# Altium PCB 630-DC2044B_REV01_DESIGN_LAYOUT.PcbDoc (part 2 of 2)
Units mil, origin at the board's own origin, x right, y up, seen from the top; angles counter-clockwise.
Board outline 3850 x 4475 mil, 4 copper layers (L1-TOP, L2- PGND/SGND-PLANE, L3-PGND/SGND-PLANE, L4-BOTTOM), stack 63.2 mil thick; 129 components, 57 nets, 276 pads, 188 vias.
Unrouted connection lines stored in the file: 3.
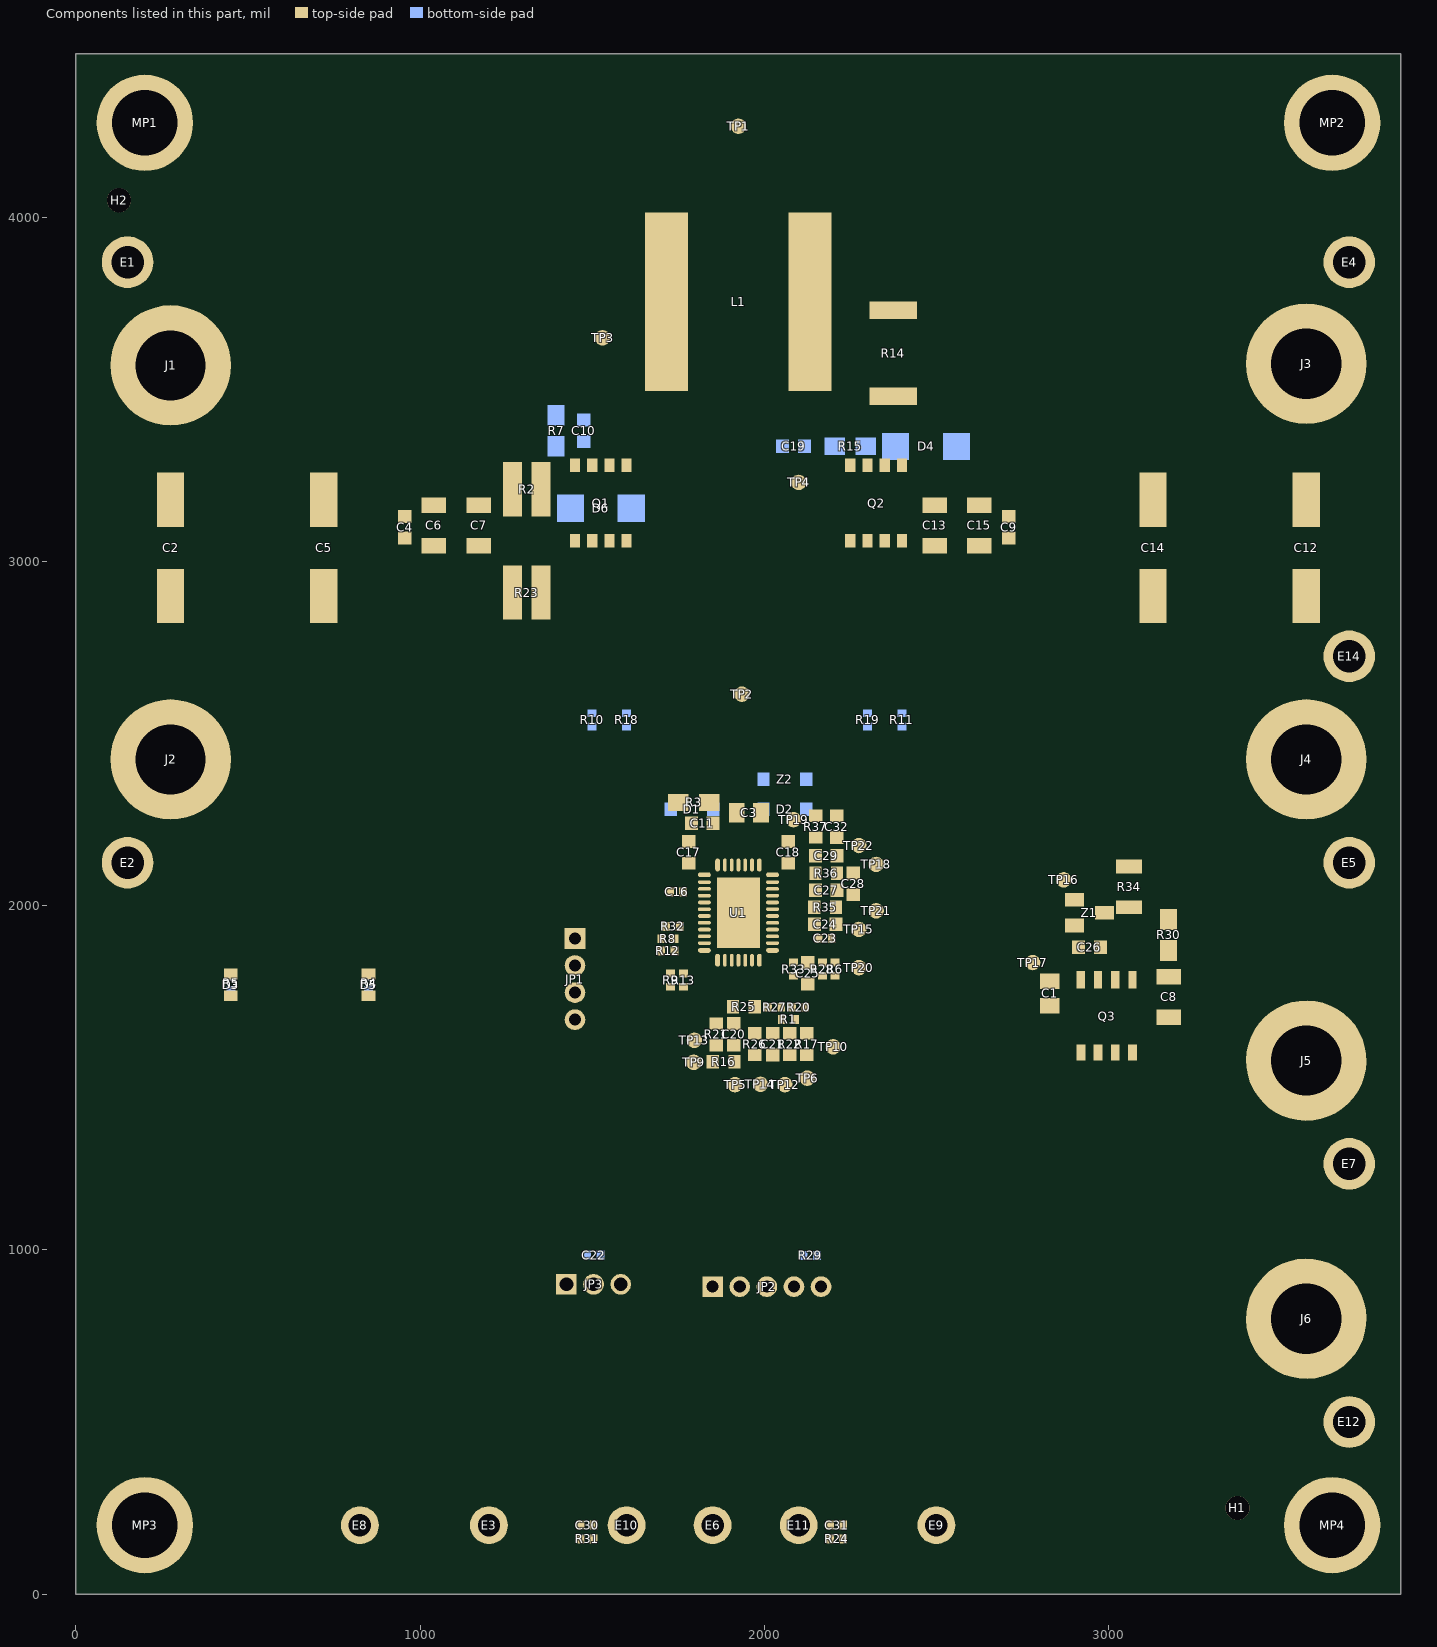
[diagram p4: the components of this part, seen from the top]

## Silkscreen, mask and mechanical layers (free items; w line width, h text height) (continued)
Assembly Drawing Top:
  drawing of 1142 lines, arcs and shapes, not listed
  text "REVISION HISTORY" at 10242.8,5160 h120
  text "APP. ENG." at 11007.8,5010 h100
  text "DATE" at 11577.8,5010 h100
  text "ECO" at 9462.8,5005 h100
  text "REV" at 9692.8,5005 h100
  text "DESCRIPTION" at 10127.8,5005 h100
  text "-" at 9542.8,4870 h100
  text "01" at 9742.8,4870 h100
  text "PRODUCTION" at 10162.8,4870 h100
  text "WT" at 11117.8,4870 h100
  text "09-07-21" at 11515,4870 h100
  text "NOTES: UNLESS OTHERWISE SPECIFIED" at 6417.8,4345 h200
  text "DETAIL \"A\"" at 4115.62,4229.83 h75
  text "1. WORKMANSHIP SHALL BE IN ACCORDANCE WITH IPC-A-610." at 5959.8,4034 h150
  text "2. ASSEMBLY REFLOW PROFILE SHALL BE IN ACCORDANCE WITH J-STD-020 WITH" at 5959.8,3834 h150
  text "MAXIMUM SOLDER TEMPERATURE OF 250 DEGREES CELSIUS." at 6159.8,3659 h150
  text "3. PARTS TO OMIT WILL BE SPECIFIED ON THE BILL OF MATERIALS" at 5959.8,3434 h150
  text "LOCATIONS OF OMITTED PARTS SHALL BE FREE OF SOLDER." at 6159.8,3234 h150
  text "MASK THE SOLDER STENCIL WHERE SMT PARTS ARE OMITTED." at 6159.8,3034 h150
  text "4. INSTALL SHUNTS AS SHOWN ON ASSY DRAWING." at 5959.8,2834 h150
  text "DETAIL \"B\"" at 4087.82,2685.69 h75
  text "5. DEPANELIZE BOARDS AFTER ASSEMBLY AND ROUTE-OUT THE BREAKOUT" at 5959.8,2634 h150
  text "TABS ON FOUR SIDES OF THE BOARD EDGE." at 6107.8,2475 h150
  text "DETAIL \"C\"" at 4047.82,2385.69 h75
  text "6. APPLY ASSEMBLY STAMP OR QA STAMP TO BOTTOM OF BOARD (UNSHOWY AREA)." at 5949.8,2249 h150
  text "7. INSTALL TURRETS, STAND-OFFS AS SHOWN BELOW:" at 5947.8,2040 h150
  text "8. APPLY DEMO S/N AT AREA ON BOTTOM SIDE AS SHOWN ON SHEET 2." at 5942.8,1845 h150
  text "(6 PLCS) : MILL-MAX 2308" at 8542.8,1520 h100
  text "DETAIL \"B\"" at 10257.8,1431.25 h60
  text "DETAIL \"A\"" at 7182.8,1430 h60
  text "(6 PLCS) : MILL-MAX 2501" at 8548.3,1392.75 h50
  text "PCB : TOP" at 6430.3,1308.09 h50
  text "PCB : TOP" at 9482.8,1118.75 h50
  text "PCB" at 8107.8,1005 h50
  text "PCB : BOTTOM" at 6430.3,808.09 h50
  text "4X" at 7977.55,693.16 h50
  text "STAND-OFF,NYLON" at 7702.55,568.16 h50
  text "PCB : BOTTOM" at 9332.8,506.25 h50
  text "SNAP ON" at 7827.55,443.16 h50
  text "DETAIL \"C\"" at 7184.8,86 h60
  text "(6 PLCS) : KEYSTONE 575-4" at 7959.8,36 h50
  text "PCB TOP" at 6384.8,-139 h50
  text "PCB BOTTOM" at 6259.8,-764 h50
  text "P" at 10762.11,-936.34 h35
  text "O" at 10822.11,-936.34 h35
  text "W" at 10892.11,-936.34 h35
  text "E" at 10972.11,-936.34 h35
  text "R" at 11032.11,-936.34 h35
  text "B" at 11117.11,-936.34 h35
  text "Y" at 11177.11,-936.34 h35
  text "APPROVALS" at 8487.8,-965 h150
  text "ANALOG" at 9820.11,-977.34 h78.74
  text "DEVICES" at 9812.11,-1099.34 h78.74
  text "TM" at 11222.11,-1101.34 h25
  text "PCB DES" at 8322.8,-1190 h100
  text "NC" at 8887.8,-1205 h100
  text "FOR ADI CUSTOMER USE ONLY" at 10922.11,-1211.34 h35
  text "WT" at 8887.8,-1380 h100
  text "TITLE:" at 9442.8,-1385 h100
  text "TOP ASSEMBLY DRAWING" at 9742.8,-1385 h100
  text "APP ENG" at 8322.8,-1390 h100
  text "HIGH VOLTAGE BUCK/BOOST" at 9800,-1525 h120
  text "MULTI-CHEMISTRY BATTERY CHARGER" at 9800,-1650 h120
  text "SIZE" at 9477.8,-1830 h100
  text "IC NO." at 9762.8,-1830 h100
  text "REV." at 11522.8,-1830 h100
  text "LTC4020" at 10050,-1850 h125
  text "N/A" at 9482.8,-1975 h120
  text "DC2044B" at 10050,-1975 h125
  text "01" at 11642.8,-1980 h130
  text "SCALE = NONE" at 8547.8,-2140 h100
  text "SHT 1 OF 1" at 11237.8,-2140 h100
Assembly Drawing Bottom:
  drawing of 903 lines, arcs and shapes, not listed
  text "8    DEMO S/N LABEL" at -625,1210 h100
  text "APPLY IN THIS AREA" at -700,1100 h100
  text "Y" at -1834.26,-854.96 h35
  text "B" at -1774.26,-854.96 h35
  text "R" at -1689.26,-854.96 h35
  text "E" at -1629.26,-854.96 h35
  text "W" at -1549.26,-854.96 h35
  text "O" at -1479.26,-854.96 h35
  text "P" at -1419.26,-854.96 h35
  text "APPROVALS" at 777.8,-895 h150
  text "ANALOG" at -477.26,-895.96 h78.74
  text "DEVICES" at -469.26,-1017.96 h78.74
  text "TM" at -1879.26,-1019.96 h25
  text "FOR ADI CUSTOMER USE ONLY" at -1634.2,-1105 h70
  text "PCB DES." at 882.8,-1145 h100
  text "NC" at 317.8,-1155 h100
  text "BOTTOM ASSEMBLY DRAWING" at -492.2,-1330 h100
  text "TITLE:" at -217.2,-1330 h100
  text "WT" at 312.8,-1330 h100
  text "APP ENG." at 897.8,-1330 h100
  text "HIGH VOLTAGE BUCK/BOOST" at -275,-1475 h120
  text "MULTI-CHEMISTRY BATTERY CHARGER" at -275,-1600 h120
  text "REV" at -2312.2,-1775 h100
  text "SIZE" at -232.2,-1795 h100
  text "IC NO." at -522.2,-1805 h100
  text "LTC4020" at -828.2,-1818 h125
  text "01" at -2406.2,-1915 h130
  text "N/A" at -217.2,-1940 h130
  text "DC2044B" at -825,-1950 h125
  text "SHT 2 of 2" at -2077.2,-2085 h100
  text "SCALE = NONE" at 752.8,-2095 h100
Layer_14:
  circle w10: c4307.5,3475 r112.5
  circle w10: c4123.75,1541.25 r112.5
  circle w10: c4323.75,1003.75 r112.5
  circle w10: c4120,2987.5 r112.5
  circle w10: c-263.75,3033.75 r112.5
  circle w10: c-463.75,3571.25 r112.5
  lines w10: -796.25,3008.75 -590,3008.75 ; -796.25,3083.75 -590,3083.75 ; -740,2971.25 -646.25,2971.25 ; -740,3046.25 -646.25,3046.25 ; -688.75,2971.25 -688.75,2496.25 36.25,2496.25 291.25,2641.25 ; -688.75,3086.25 -688.75,3571.25 -578.75,3571.25 ; -348.75,3571.25 36.25,3571.25 286.25,3421.25 -263.75,3421.25 -263.75,3152.5 ; -263.75,2921.25 -263.75,2646.25 286.25,2646.25 ; 3568.75,1933.75 3823.75,2078.75 4548.75,2078.75 4548.75,1635 ; 3570,2625 4120,2625 4120,2875 ; 3570,3390 3820,3475 4195,3475 ; 3573.75,1928.75 4123.75,1928.75 4123.75,1653.75 ; 3575,2625 3815,2480 ; 3575,3380 4120,3380 4120,3100 ; 3820,2480 4545,2480 4545,2900 ; 4123.75,1422.5 4123.75,1153.75 3573.75,1153.75 3823.75,1003.75 4208.75,1003.75 ; 4420,3475 4545,3475 4545,3075 ; 4438.75,1003.75 4548.75,1003.75 4548.75,1455 ; 4340,1460 4340,1635 4805,1635 4805,1460 4340,1460 ; 4395,2900 4395,3075 4695,3075 4695,2900 4395,2900
  text "+" at -663.75,3671.25 h62.5 r180
  text "-" at -263.75,3590 h62.5
  text "+" at 4120.64,3572.41 h62.5 r180
  text "A" at -485,3535 h62.5
  text "-" at 4495.64,3497.41 h62.5
  text "A" at 4320,3430 h55
  text "+" at 3995.64,3172.41 h62.5 r180
  text "+" at -213.75,3146.25 h62.5
  text "+" at -727.5,3112.5 h62.5
  text "+" at 4645.64,3097.41 h62.5
  text "V" at -280,2990 h62.5
  text "LOAD" at 4443.14,2949.91 h55
  text "V" at 4145.64,2947.41 h62.5
  text "-" at -727.5,2882.5 h62.5
  text "-" at -213.75,2846.25 h62.5
  text "-" at 4645.64,2822.41 h62.5
  text "-" at 4045.64,2797.41 h62.5
  text "-" at 4073.75,1728.75 h62.5 r180
  text "-" at 4590,1720 h62.5 r180
  text "BETTERY" at 4360,1500 h62.5
  text "V" at 4095,1495 h62.5
  text "+" at 4073.75,1428.75 h62.5 r180
  text "+" at 4590,1415 h62.5 r180
  text "-" at 4123.75,985 h62.5 r180
  text "A" at 4305,965 h62.5
  text "+" at 4523.75,903.75 h62.5
Layer_15:
  lines w10: -62.33,333.88 780.74,333.88
  text "COMPONENT SIDE" at -57.34,363.88 h60
Layer_18:
  text "SILKSCREEN TOP" at 2335,-290 h50
Drill Drawing:
  drawing of 1514 lines, arcs and shapes, not listed
  text "REVISION HISTORY" at 10062.8,4865 h120
  text "APP. ENG." at 10812.8,4740 h100
  text "DATE" at 11387.8,4740 h100
  text "DESCRIPTION" at 9937.8,4735 h100
  text "ECO" at 9277.8,4730 h100
  text "REV" at 9507.8,4730 h100
  text "PRODUCTION" at 9942.8,4595 h100
  text "WT" at 10917.8,4595 h100
  text "09-07-21" at 11340,4595 h100
  text "-" at 9362.8,4590 h100
  text "01" at 9557.8,4585 h100
  text "LAYER STRUCTURE" at 6092.8,4495 h170
  text "4.475\"" at -425,4450 h100
  text "THICKNESS (IN)" at 5612.8,4220 h100
  text ".0005\"" at 6012.8,4095 h100
  text "SOLDER MASK" at 6487.8,4095 h100
  text ".0028\"" at 6011.8,3988 h100
  text "TOP LAYER" at 7465.8,3988 h100
  text ".012\"" at 6011.8,3838 h100
  text "PREPREG" at 7465.8,3838 h100
  text ".0028\"" at 6011.8,3688 h100
  text "INNNER LAYER" at 7465.8,3688 h100
  text ".062\" +/- 10%" at 5312.8,3620 h100
  text ".028\"" at 6037.8,3545 h100
  text "CORE MATERIAL" at 7465.8,3538 h100
  text "4 LAYERS" at 5362.8,3520 h100
  text ".0028\"" at 6011.8,3388 h100
  text "INNER LAYER" at 7465.8,3388 h100
  text ".012\"" at 6011.8,3238 h100
  text "PREPREG" at 7465.8,3238 h100
  text ".0028\"" at 6011.8,3088 h100
  text "BOTTOM LAYER" at 7465.8,3088 h100
  text ".0005\"" at 6012.8,2970 h100
  text "SOLDER MASK" at 6487.8,2970 h100
  text "NOTES: UNLESS OTHERWISE SPECIFIED" at 5767.8,2495 h204
  text "1. FABRICATION: FABRICATION AND ACCEPTANCE TO MEET THE REQUIREMENTS OF IPC-A-600" at 5642.8,2095 h125
  text "AND IPC/ANSI-MLL950-C CLASS 2, AOL .25 GENERAL INSPECTION LEVEL II." at 6592.8,1970 h125
  text "2. MATERIAL: - EPOXY FIBERGLASS, NEMA GRADE FR-4" at 5657.66,1802.01 h120
  text "- FINISHED THICKNESS TO BE 0.062\" +/- .005\"" at 6401.66,1649.01 h120
  text "- TOTAL OF 4 LAYERS WITH 2 OZ. CU ON THE ALL LAYERS" at 6401.66,1499.01 h120
  text "- FLAMMABILITY RATING: 94 V-O MINIMUM." at 6401.66,1349.01 h120
  text "4. SIZE: CUT TO DIMENSIONS AND TOLERANCES SHOWN 0.00\" ARE PRIMARY DATUMS." at 5662.8,1170 h120
  text "5. FRONT TO BACK LAYER REGISTRATION." at 5662.8,970 h120
  text "-SHALL BE WITHIN 0.005\" (0.13mm) TO COMPLY WITH IPC-A-600, CLASS 2." at 6387.8,820 h120
  text "5. DRILLING:  - DRILL HOLES PER SCHEDULE. PLATE THROUGH" at 5637.8,620 h120
  text "HOLES WITH COPPER, 0.001\" THICK MIN." at 6437.8,495 h120
  text "- ALL HOLE SIZES ARE SPECIFIED AFTER PLATING." at 6362.8,370 h120
  text "- HOLE LOCATION TOLERANCES ARE +/-0.003\" IN RELATION TO CENTER." at 6362.8,245 h120
  text "6. FINISH: - SMOBC USING LPI BOTH SIDES, PER IPC-SM-840, CLASS T,  COLOR GREEN. TENT BOTH SIDES." at 5637.8,95 h120
  text "0.00\"" at -340,-25 h100
  text "- APPLY ELECTROLESS NICKEL GOLD IMMERSION (ENIG) OVER EXPOSED COPPER PER IPC-4552." at 6337.8,-55 h120
  text "- FOR SILKSCREEN: BOTH SIDES USE WHITE NON-CONDUCTIVE INK." at 6312.8,-230 h120
  text "0.00\"" at 20,-330 h100 r90
  text "3.850\"" at 3875,-375 h100 r90
  text "7. DO NOT ALTER ARTWORK e.g. TO ADD LOGO OR DATE CODE." at 5662.8,-405 h120
  text "-PAD SIZE CAN BE MODIFIED TO MEET END FINISH." at 6362.8,-555 h120
  text "8. PCBS ARE TO BE RoHS COMPLIANT." at 5662.8,-755 h120
  text "9. SCORING FOR PANELIZED PCB:" at 5687.8,-980 h120
  text ".020" at 7342.94,-1245.25 h120
  text "x" at 6277.94,-1425.25 h96
  text "x" at 6322.94,-1425.25 h96
  text "x" at 6367.94,-1425.25 h96
  text "x" at 6412.94,-1425.25 h96
  text "x" at 6457.94,-1425.25 h96
  text "x" at 6502.94,-1425.25 h96
  text "x" at 6547.94,-1425.25 h96
  text "x" at 6592.94,-1425.25 h96
  text "x" at 6637.94,-1425.25 h96
  text "x" at 6682.94,-1425.25 h96
  text "x" at 6727.94,-1425.25 h96
  text "x" at 6772.94,-1425.25 h96
  text "x" at 6817.94,-1425.25 h96
  text "x" at 6862.94,-1425.25 h96
  text "x" at 6907.94,-1425.25 h60
  text "x" at 6277.94,-1545.25 h96
  text "x" at 6322.94,-1545.25 h96
  text "x" at 6367.94,-1545.25 h96
  text "x" at 6412.94,-1545.25 h96
  text "x" at 6457.94,-1545.25 h96
  text "x" at 6502.94,-1545.25 h96
  text "x" at 6547.94,-1545.25 h96
  text "x" at 6592.94,-1545.25 h96
  text "x" at 6637.94,-1545.25 h96
  text "x" at 6682.94,-1545.25 h96
  text "x" at 6727.94,-1545.25 h96
  text "x" at 6772.94,-1545.25 h96
  text "x" at 6817.94,-1545.25 h96
  text "x" at 6862.94,-1545.25 h96
  text "x" at 6907.94,-1545.25 h60
  text ".017" at 6217.94,-1684 h120
  text "ADDITIONAL REQUREMENT FOR PROTOTYPE FAB ONLY:" at 867.8,-1905 h120
  text "1. OUTGOING INSPECTION REPORT (BASED ON ACTUAL MEASUREMENTS AND CROSS SECTION)." at 817.8,-2080 h120
  text "UNLESS OTHERWISE SPECIFIED" at 7112.8,-2100 h70
  text "P" at 10552.39,-2128.87 h35
  text "O" at 10612.39,-2128.87 h35
  text "W" at 10682.39,-2128.87 h35
  text "E" at 10762.39,-2128.87 h35
  text "R" at 10822.39,-2128.87 h35
  text "B" at 10907.39,-2128.87 h35
  text "Y" at 10967.39,-2128.87 h35
  text "ANALOG" at 9610.39,-2169.87 h78.74
  text "APPROVALS" at 8342.8,-2185 h150
  text "DIMENSIONS ARE IN INCHES" at 7112.8,-2225 h80
  text "DEVICES" at 9602.39,-2291.87 h78.74
  text "TM" at 11012.39,-2293.87 h25
  text "ADDITIONAL REQUREMENTS FOR PRODUCTION FAB ONLY:" at 842.8,-2330 h120
  text "TOLERANCES:" at 7132.8,-2340 h80
  text "PCB DES" at 8177.8,-2390 h100
  text "NC" at 8812.8,-2390 h100
  text "FOR ADI CUSTOMER USE ONLY" at 10714.8,-2407 h70
  text "+" at 7582.8,-2410 h60
  text "0.XX\" =  0.01\"" at 7337.8,-2435 h80
  text "-" at 7587.8,-2445 h60
  text "+" at 7582.8,-2510 h60
  text "1. PROVIDE COMPLIANCE CERTIFICATES FOR RoHS, REACH AND CONFLICT-FREE MINERALS." at 817.8,-2530 h120
  text "0.XXX\" =  0.005\"" at 7292.8,-2535 h80
  text "-" at 7587.8,-2545 h60
  text "APP ENG" at 8177.8,-2565 h100
  text "WT" at 8812.8,-2565 h100
  text "TITLE:" at 9302.8,-2565 h100
  text "FABRICATION DRAWING" at 9602.8,-2565 h100
  text "2. SOLDERABILITY BOARD WITH TEST RESULTS." at 817.8,-2655 h120
  text "INTERPRET DIM AND TOL" at 7132.8,-2665 h80
  text "HIGH VOLTAGE BUCK/BOOST" at 9575,-2700 h120
  text "PER ASME Y14.5M-1994" at 7132.8,-2765 h80
  text "3. OUTGOING INSPECTION REPORT (BASED ON ACTUAL MEASUREMENTS AND CROSS SECTION)." at 817.8,-2780 h120
  text "MULTI-CHEMISTRY BATTERY CHARGER" at 9575,-2825 h120
  text "THIRD ANGLE PROJECTION" at 7122.8,-2865 h80
  text "4. VACUUM PACKED WITH DESICCANT." at 817.8,-2905 h120
  text "SIZE" at 9342.8,-3015 h100
  text "IC NO." at 9627.8,-3015 h100
  text "REV" at 11427.8,-3015 h100
  text "5. FULL PANEL WITH NO REJECT." at 817.8,-3030 h120
  text "LTC4020" at 10000,-3045 h125
  text "01" at 11500.8,-3152 h130
  text "N/A" at 9327.8,-3165 h130
  text "DC2044B" at 10000,-3170 h125
  text "SCALE = NONE" at 8347.8,-3315 h100
  text "SHT 1 OF 1" at 11147.8,-3320 h100
Layer_19:
  text "SILKSCREEN BOTTOM" at 2280,-295 h50